# Altium PCB PCB4.PcbDoc (part 4 of 7)
Units mm, origin at the board's own origin, x right, y up, seen from the top; angles counter-clockwise.
Board outline 234.9 x 198.3 mm, 4 copper layers (Top Layer, Signal Layer 2, Mid, Bottom Layer), stack 3.052 mm thick; 410 components, 320 nets, 2032 pads, 297 vias.
Unrouted connection lines stored in the file: 1.
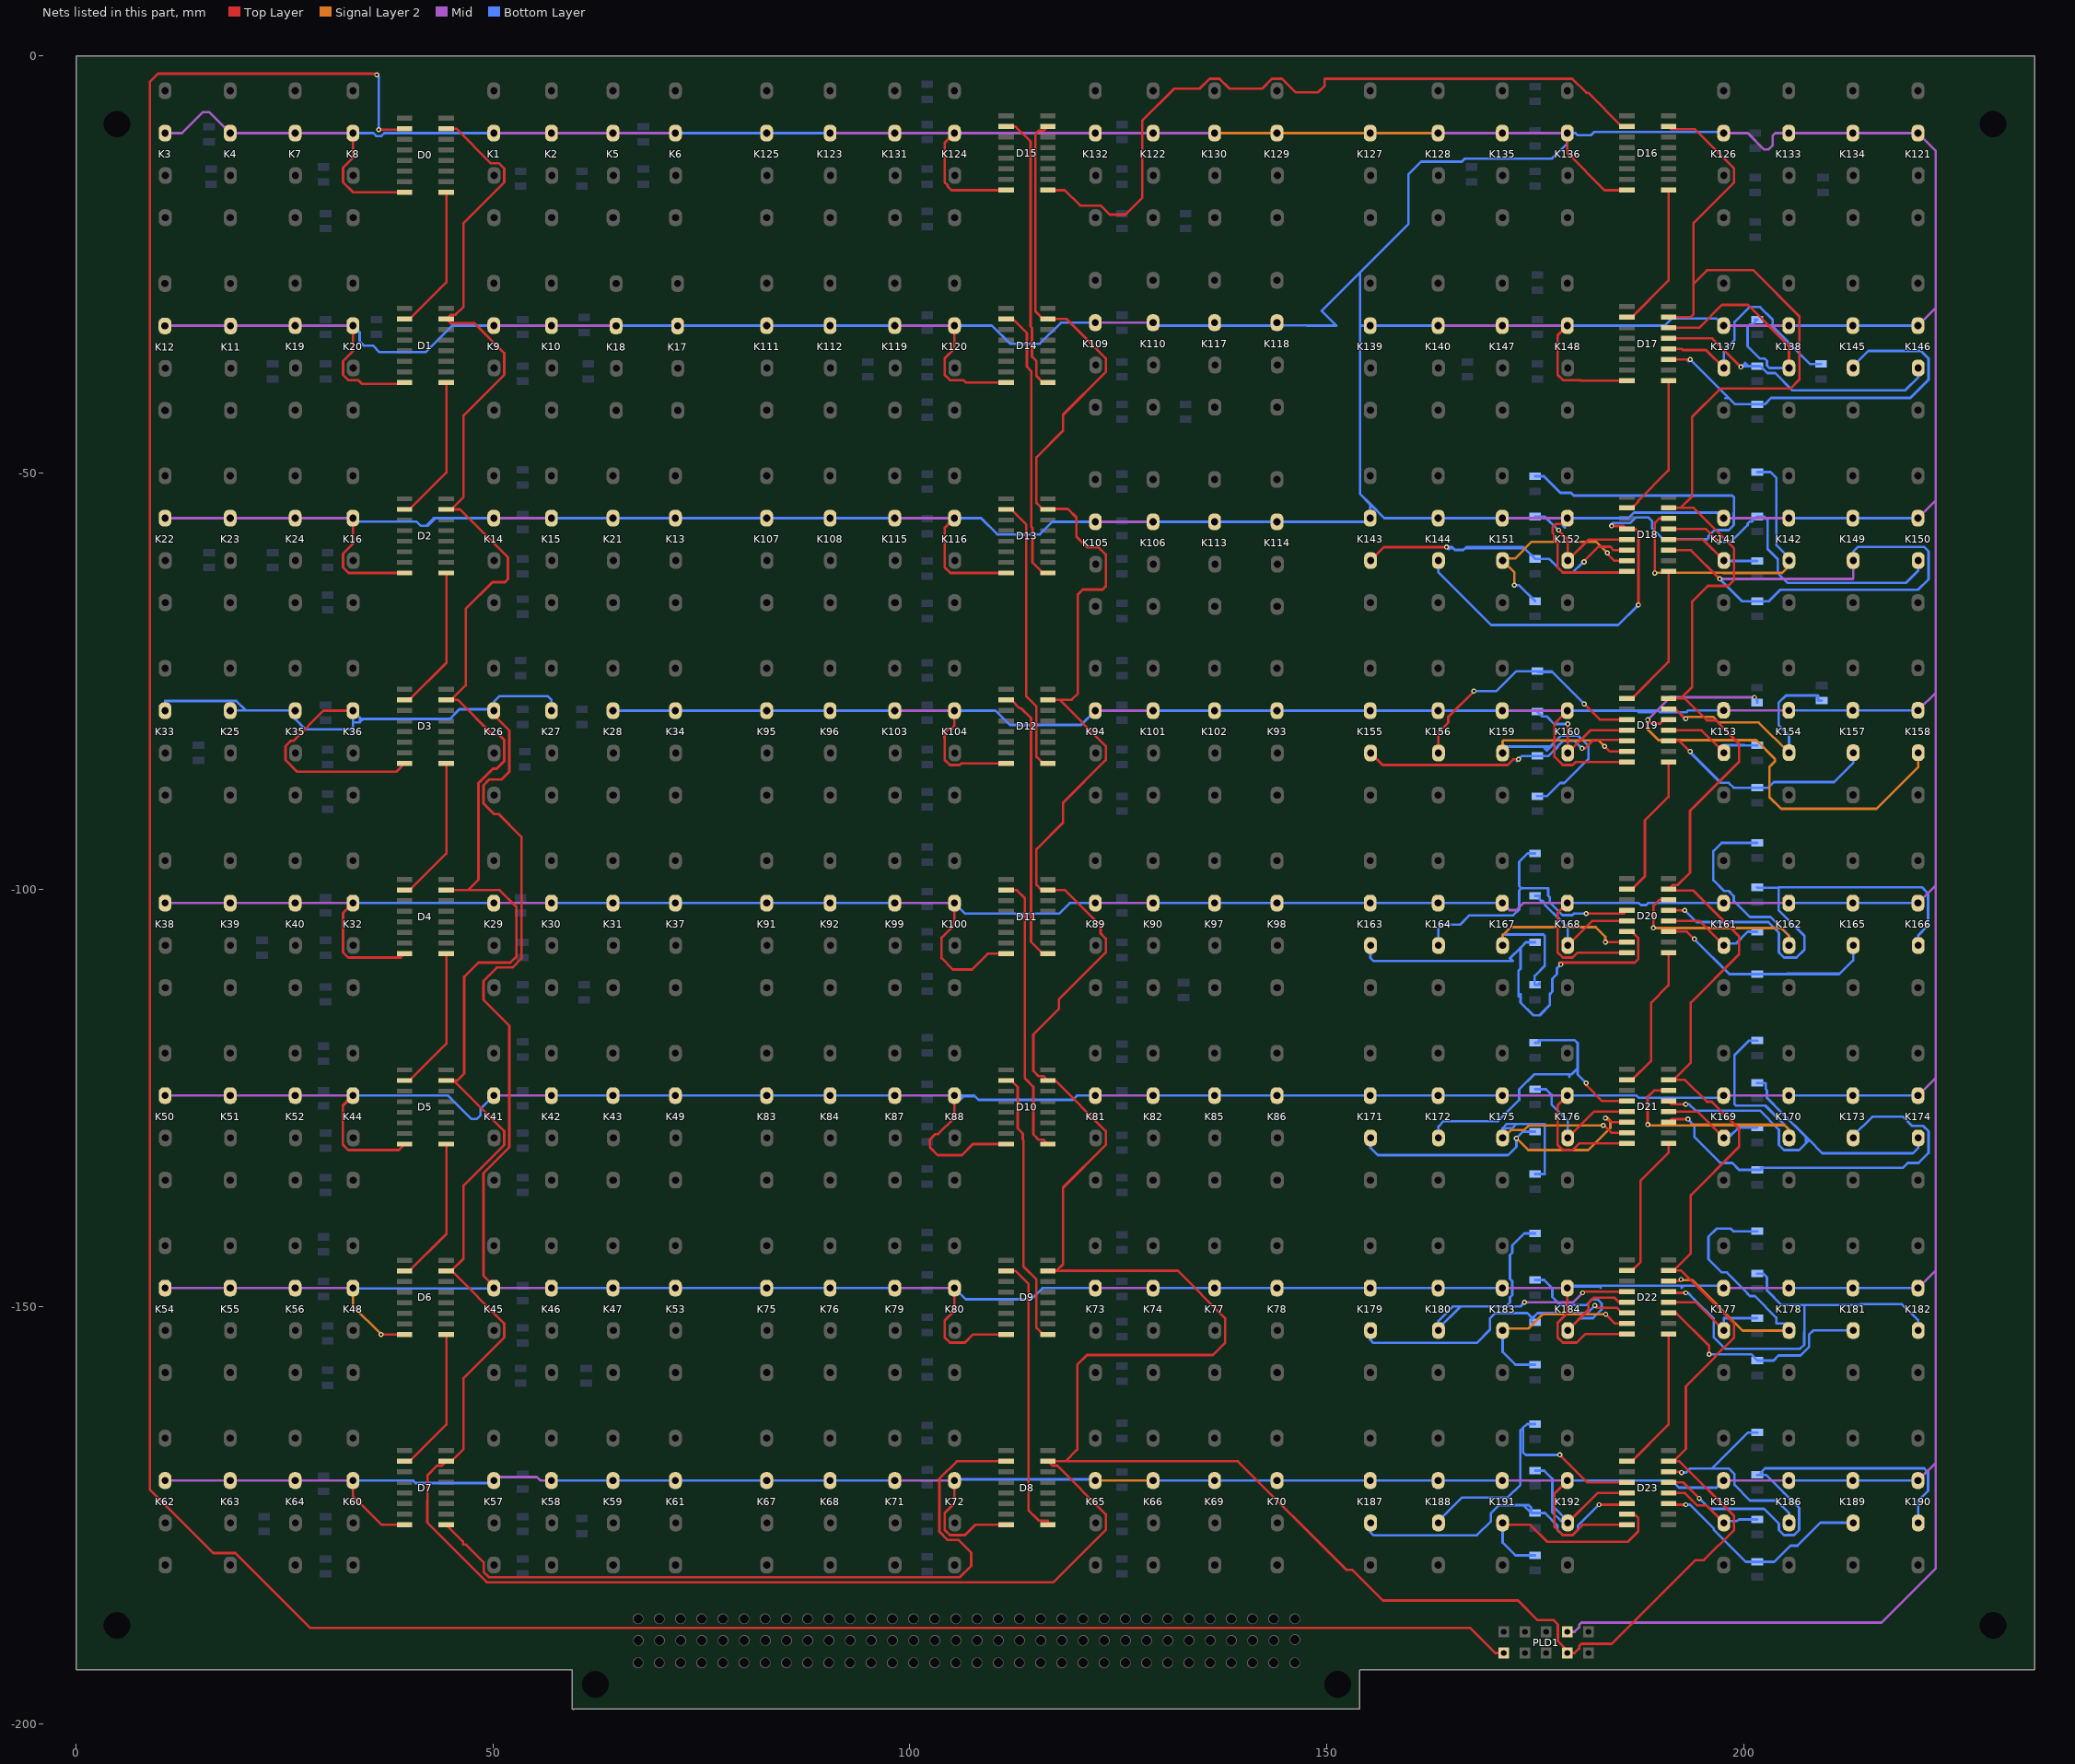
[diagram p6: the nets of this part, all layers, seen from the top]

## Via types
v1: diameter 0.6, hole 0.3, Top Layer to Bottom Layer, 292 vias
v2: diameter 0.7, hole 0.3, Top Layer to Bottom Layer, 5 vias

## Nets (pads, with @x,y where several pads share a name; then routed paths per layer and width w, separated by ;. In a path a pad name is that pad's centre, name@x,y a point inside that pad or via, vN(x,y) a via of type N, cw(c..) or ccw(c..) an arc to the next point about the centre after c; other vN are vias at no path point) (continued)
D17-4: D17.14 K138.3 VD141.A | length 31.6
  Top Layer w0.3: D17.14@190.966,-32.622 194.631,-32.622 197.375,-29.878 200.48,-29.878 205.417,-34.815 K138.3@205.417,-37.436
  Bottom Layer w0.3: VD141.A@201.319,-31.624 VD141.A@201.605,-31.625 201.005,-32.225 200.719,-32.225 200.455,-32.488 200.455,-34.832 201.936,-36.313 202.491,-36.313 202.755,-36.576 202.755,-37.132 203.059,-37.436 K138.3@205.417,-37.436 K138.3@205.417,-36.549
D17-5: D17.13 K146.3 VD142.A | length 35.5
  Top Layer w0.3: D17.13@190.966,-33.892 196.213,-33.892 v1(199.642,-37.32)
  Bottom Layer w0.3: v1(199.642,-37.32) v1@199.75,-37.212 ; K146.3@220.913,-37.436 220.913,-38.527 219.326,-40.115 205.814,-40.115 203.735,-38.036 202.811,-38.036 201.987,-37.212 200.55,-37.212 ; v1@199.75,-37.212 200.15,-36.812 200.55,-37.212 ; v1@199.75,-37.212 200.55,-37.212
D17-6: D17.12 K137.3 VD143.A | length 28.1
  Top Layer w0.3: D17.12@190.966,-35.162 192.542,-35.162 192.656,-35.277 195.447,-35.277 K137.3@197.607,-37.436
  Bottom Layer w0.3: K137.3@197.607,-37.436 197.607,-35.365 198.88,-34.092 198.88,-31.91 200.658,-30.132 201.928,-30.132 203.452,-31.656 203.452,-32.494 207.916,-36.958 VD143.A@209.256,-36.959
D17-7: D17.11 K145.3 VD144.A | length 48.1
  Top Layer w0.3: D17.11@190.966,-36.432 v1(193.584,-36.432)
  Bottom Layer w0.3: 193.292,-36.558 v1@193.374,-36.641 ; v1(193.584,-36.432) 198.193,-41.041 ; 197.774,-41.041 198.193,-41.041 ; K145.3@213.103,-37.436 213.103,-37.193 214.907,-35.39 221.232,-35.39 222.146,-36.304 222.146,-38.844 219.962,-41.029 203.274,-41.029 202.518,-41.784 VD144.A@201.605,-41.785 198.936,-41.784 198.193,-41.041
D18-0: D18.4 K144.3 VD145.A | length 87.9
  Top Layer w0.3: v1(184.148,-56.371) 185.585,-56.371 D18.4@185.966,-56.752 187.005,-56.752 187.348,-57.094 v1(187.348,-65.845)
  Bottom Layer w0.3: K144.3@163.379,-60.514 163.379,-61.704 163.379,-61.942 169.695,-68.258 184.935,-68.258 v1(187.348,-65.845) ; VD145.A@174.965,-50.421 176.012,-50.42 177.995,-52.404 179.267,-52.404 179.601,-52.738 ; 180.338,-52.738 179.601,-52.738 ; v1(184.148,-56.371) 184.148,-56.117 184.23,-56.034 186.38,-56.034 187.047,-55.366 188.593,-55.366 188.974,-55.747 188.974,-56.624 190.32,-57.971 195.582,-57.971 195.752,-57.801 195.752,-57.589 196.468,-56.873 196.965,-56.873 196.976,-56.884 198.158,-56.884 198.779,-56.263 198.779,-54.774 198.803,-54.75 198.803,-52.916 198.626,-52.738 179.601,-52.738
D18-1: D18.5 K152.3 VD146.A | length 15.7
  Top Layer w0.3: v1(177.798,-56.879) 177.798,-56.929 178.875,-58.007 K152.3@178.875,-60.514 181.367,-58.022 D18.5@185.966,-58.022
  Bottom Layer w0.3: VD146.A@174.966,-55.247 176.115,-55.246 177.747,-56.879 v1(177.798,-56.879)
D18-2: D18.6 K143.3 VD147.A | length 44.2
  Top Layer w0.3: K143.3@155.232,-60.514 156.835,-58.91 v1(164.336,-58.91) ; v2(180.846,-60.689) 180.742,-60.689 182.559,-58.872 183.97,-58.872 184.39,-59.292 D18.6@185.966,-59.292
  Bottom Layer w0.3: v2@180.592,-60.839 179.466,-61.964 178.284,-61.964 177.008,-60.688 176.646,-60.326 VD147.A@174.966,-60.327 173.703,-59.064 ; v2@180.592,-60.689 v2(180.846,-60.689) ; 165.357,-59.257 165.011,-58.91 v1(164.336,-58.91) 164.59,-59.164 164.69,-59.064 165.164,-59.064 165.357,-59.257 ; 165.357,-59.257 165.854,-59.257 ; 165.357,-59.257 165.854,-59.257 ; 165.854,-59.257 166.374,-59.257 ; 165.854,-59.257 166.374,-59.257 ; 166.374,-59.257 166.567,-59.064 173.703,-59.064 ; 166.374,-59.257 166.72,-58.91 173.55,-58.91 173.703,-59.064
D18-3: D18.7 K151.3 VD148.A | length 23.8
  Top Layer w0.3: v1(183.64,-59.622) 183.64,-59.723 184.478,-60.562 D18.7@185.966,-60.562
  Signal Layer 2 w0.3: v1(172.464,-63.482) 172.464,-61.912 K151.3@171.065,-60.514 171.065,-60.282 172.54,-60.282 174.546,-58.275 181.658,-58.275 182.293,-58.275 v1(183.64,-59.622)
  Bottom Layer w0.3: v1(172.464,-63.482) 173.042,-63.482 VD148.A@174.966,-65.407
D18-4: D18.14 K142.3 VD149.A | length 38.2
  Top Layer w0.3: v1(189.329,-62.022) 189.329,-55.989 189.837,-55.482 D18.14@190.966,-55.482
  Signal Layer 2 w0.3: v1(189.329,-62.022) 189.381,-61.97 197.412,-61.97 197.464,-62.022 204.572,-62.022 205.23,-61.364 205.417,-61.364 K142.3@205.417,-60.514
  Bottom Layer w0.3: VD149.A@201.605,-49.913 203.198,-49.912 203.909,-50.624 203.909,-58.68 205.417,-60.189 205.417,-60.282 K142.3@205.417,-60.514
D18-5: D18.13 K150.3 VD150.A | length 40
  Top Layer w0.3: D18.13@190.966,-56.752 195.451,-56.752 v1(196.975,-58.275)
  Bottom Layer w0.3: v1(196.975,-58.275) 198.464,-58.275 200.455,-56.284 200.455,-56.11 200.719,-55.847 201.005,-55.847 VD150.A@201.605,-55.247 202.416,-55.246 202.842,-55.672 202.842,-59.114 204.052,-60.324 204.052,-62 205.255,-63.203 219.414,-63.203 220.913,-61.704 K150.3@220.913,-60.514
D18-6: D18.12 K141.3 VD151.A | length 11.7
  Top Layer w0.3: D18.12@190.966,-58.022 195.114,-58.022 K141.3@197.607,-60.514
  Bottom Layer w0.3: K141.3@197.607,-60.514 197.673,-60.58 VD151.A@201.605,-60.581
D18-7: D18.11 K149.3 VD152.A | length 66.9
  Top Layer w0.3: D18.11@190.966,-59.292 193.673,-59.292 v1(197.102,-62.72)
  Mid w0.3: v1(197.102,-62.72) 213.078,-62.72 213.103,-62.695 K149.3@213.103,-60.514
  Bottom Layer w0.3: v1(197.102,-62.72) 199.788,-65.406 VD152.A@201.605,-65.407 203.001,-65.406 204.391,-64.016 220.901,-64.016 222.146,-62.771 222.146,-59.418 221.613,-58.885 213.675,-58.885 213.103,-59.457 K149.3@213.103,-60.514
D19-0: D19.4 K156.3 VD153.A | length 32.8
  Top Layer w0.3: K156.3@163.379,-83.592 163.379,-81.134 164.551,-79.962 164.551,-79.269 v1(167.638,-76.182) ; v1(180.846,-77.706) 182.751,-79.611 D19.4@185.966,-79.611
  Bottom Layer w0.3: v1(167.638,-76.182) 170.315,-76.182 171.616,-74.882 172.709,-73.788 VD153.A@175.22,-73.789 ; v1(180.846,-77.706) 177.036,-73.896 ; VD153.A@175.22,-73.789 175.328,-73.896 177.036,-73.896 ; VD153.A@175.22,-73.789 176.928,-73.788 177.036,-73.896
D19-1: D19.5 K160.3 VD154.A | length 17.4
  Top Layer w0.3: v1(178.875,-80.115) K160.3@178.875,-83.592 181.585,-80.881 D19.5@185.966,-80.881
  Bottom Layer w0.3: VD154.A@175.22,-78.615 175.82,-79.214 176.369,-79.214 ; v1@179.068,-80.115 v1(178.875,-80.115) 177.27,-80.115 ; 176.37,-79.214 177.27,-80.115 ; 176.369,-79.214 177.27,-80.115
D19-2: D19.6 K155.3 VD155.A | length 33.7
  Top Layer w0.3: K155.3@155.232,-83.592 156.682,-85.042 171.656,-85.042 172.343,-84.355 v1(172.972,-84.355) ; v1(180.592,-83.04) 180.947,-83.04 181.963,-82.024 185.722,-82.024 185.734,-82.036 185.851,-82.036 D19.6@185.966,-82.151
  Bottom Layer w0.3: v1@172.762,-84.565 v1(172.972,-84.355) 173.378,-83.948 VD155.A@175.219,-83.949 176.57,-83.948 177.663,-82.855 177.663,-82.762 178.284,-82.142 179.693,-82.142 v1(180.592,-83.04)
D19-3: D19.7 K159.3 VD156.A | length 40.2
  Top Layer w0.3: v1(183.284,-82.786) 183.919,-83.421 D19.7@185.966,-83.421
  Signal Layer 2 w0.3: K159.3@171.065,-83.592 171.065,-82.202 171.192,-82.075 182.573,-82.075 v1(183.284,-82.786)
  Bottom Layer w0.3: K159.3@171.065,-83.592 171.065,-82.837 175.918,-82.837 ; VD156.A@175.22,-88.775 176.382,-88.774 177.96,-87.197 178.467,-87.197 181.354,-84.311 181.354,-82.742 181.342,-82.73 180.153,-81.542 178.035,-81.542 177.063,-82.514 ; 175.918,-82.837 176.375,-83.294 177.063,-82.607 177.063,-82.514 ; 175.918,-82.837 176.74,-82.837 177.063,-82.514
D19-4: D19.14 K154.3 VD157.A | length 29.5
  Top Layer w0.3: D19.14@190.966,-78.341 191.821,-78.341 192.964,-79.485 v1(193.038,-79.485)
  Signal Layer 2 w0.3: v1(193.038,-79.485) 193.067,-79.485 193.292,-79.26 196.299,-79.26 196.976,-79.936 201.787,-79.936 K154.3@205.417,-83.566
  Bottom Layer w0.3: K154.3@205.417,-83.566 205.417,-81.491 204.163,-80.237 204.163,-77.579 205.052,-76.69 208.887,-76.69 208.887,-77.306 VD157.A@209.332,-77.307
D19-5: D19.13 K158.3 VD158.A | length 71.5
  Top Layer w0.3: v1(188.466,-79.611) 188.916,-80.061 189.965,-80.061 190.415,-79.611 D19.13@190.966,-79.611
  Mid w0.3: v1(188.466,-79.611) 191.158,-76.919 v1(201.267,-76.919)
  Signal Layer 2 w0.3: v1(188.466,-79.611) 188.466,-80.754 189.761,-82.05 190.904,-82.05 ; K158.3@220.913,-83.566 220.913,-85.264 215.898,-90.279 204.468,-90.279 203.071,-88.882 203.071,-85.25 203.731,-84.59 203.731,-84.311 201.47,-82.05 199.87,-82.05 ; 190.904,-82.05 190.929,-82.075 193.196,-82.075 193.221,-82.05 ; 190.904,-82.05 193.221,-82.05 ; 193.221,-82.05 199.87,-82.05 ; 193.221,-82.05 193.235,-82.036 199.857,-82.036 199.87,-82.05
  Bottom Layer w0.3: v1(201.267,-76.919) 201.597,-77.249 201.597,-77.56 VD158.A@201.586,-77.561
D19-6: D19.12 K153.3 VD159.A | length 13.9
  Top Layer w0.3: D19.12@190.966,-80.881 194.922,-80.881 K153.3@197.607,-83.566
  Bottom Layer w0.3: K153.3@197.607,-83.566 197.607,-82.659 198.811,-82.659 ; VD159.A@201.605,-82.679 200.073,-82.678 ; 198.811,-82.659 198.83,-82.678 200.073,-82.678 ; 198.811,-82.659 200.054,-82.659 200.073,-82.678
D19-7: D19.11 K157.3 VD160.A | length 32.3
  Top Layer w0.3: D19.11@190.966,-82.151 192.276,-82.151 v1(193.546,-83.421)
  Bottom Layer w0.3: K157.3@213.103,-83.566 213.103,-84.794 210.818,-87.079 203.604,-87.079 202.925,-87.758 VD160.A@201.605,-87.759 198.78,-87.758 198.193,-87.172 197.296,-87.172 ; 197.296,-87.172 v1(193.546,-83.421) 193.546,-83.548 197.168,-87.172 197.296,-87.172
D20-0: D20.4 K164.3 VD161.A | length 36
  Top Layer w0.3: v1(181.1,-102.852) 185.585,-102.852 D20.4@185.966,-102.472
  Bottom Layer w0.3: K164.3@163.379,-106.669 163.379,-104.619 163.825,-104.173 165.987,-104.173 167.104,-103.056 172.337,-103.056 173.048,-102.344 173.048,-100.058 173.302,-99.804 ; VD161.A@174.966,-95.633 174.07,-95.632 173.048,-96.655 173.048,-99.551 173.302,-99.804 ; v1(181.1,-102.852) 179.613,-102.852 179.426,-103.039 178.244,-103.039 176.716,-101.511 176.716,-100.876 176.528,-100.688 176.528,-99.804 173.302,-99.804
D20-1: D20.5 K168.3 VD162.A | length 16.3
  Top Layer w0.3: K168.3@178.875,-106.669 181.803,-103.742 D20.5@185.966,-103.742
  Bottom Layer w0.3: VD162.A@174.966,-100.713 175.516,-100.712 175.516,-101.16 175.668,-101.312 175.852,-101.312 176.116,-101.576 176.116,-101.76 177.995,-103.639 178.036,-103.639 178.875,-104.478 K168.3@178.875,-106.669
D20-2: D20.6 K163.3 VD163.A | length 54.2
  Top Layer w0.3: v1(178.052,-108.948) 177.822,-108.719 186.923,-108.719 187.341,-108.302 187.341,-105.795 186.557,-105.012 D20.6@185.966,-105.012
  Bottom Layer w0.3: K163.3@155.232,-106.669 155.232,-108.176 155.573,-108.517 172.273,-108.517 171.956,-108.199 173.216,-106.939 ; 172.972,-112.781 172.972,-109.703 173.216,-109.459 173.216,-106.939 ; 173.216,-112.517 173.216,-113.511 174.75,-115.045 175.512,-115.045 176.728,-113.828 176.728,-112.505 177.023,-112.209 177.023,-110.647 177.585,-110.085 177.585,-109.415 v1(178.052,-108.948) ; VD163.A@174.966,-106.301 173.854,-106.3 173.216,-106.939
D20-3: D20.7 K167.3 VD164.A | length 31.4
  Top Layer w0.3: v1(183.386,-106.282) D20.7@185.966,-106.282
  Signal Layer 2 w0.3: K167.3@171.065,-106.669 171.065,-105.496 172.083,-104.478 182.242,-104.478 183.386,-105.621 v1(183.386,-106.282) v1@183.386,-106.408
  Bottom Layer w0.3: K167.3@171.065,-106.669 171.065,-105.367 175.943,-105.367 176.121,-105.545 176.121,-109.101 174.916,-110.306 174.916,-111.38 175.516,-111.38 175.516,-111.193 VD164.A@175.486,-111.163
D20-4: D20.14 K162.3 VD165.A | length 45.1
  Top Layer w0.3: v1(189.151,-104.58) 189.151,-101.913 189.863,-101.202 D20.14@190.966,-101.202
  Signal Layer 2 w0.3: v1(189.151,-104.58) 204.477,-104.58 205.417,-105.519 K162.3@205.417,-106.669
  Bottom Layer w0.3: VD165.A@201.605,-94.363 197.337,-94.362 196.34,-95.359 196.34,-98.865 197.614,-100.139 198.158,-100.139 198.779,-100.76 198.779,-101.304 200.743,-103.268 203.192,-103.268 205.417,-105.493 K162.3@205.417,-106.669
D20-5: D20.13 K166.3 VD166.A | length 56.7
  Top Layer w0.3: D20.13@190.966,-102.472 v1(192.911,-102.472)
  Bottom Layer w0.3: v1(192.911,-102.472) 194.308,-103.868 202.944,-103.868 204.205,-105.13 204.205,-107.499 204.826,-108.119 206.313,-108.119 207.262,-107.17 207.262,-105.515 204.165,-102.419 204.165,-99.756 ; VD166.A@201.605,-99.697 201.654,-99.745 204.154,-99.745 204.165,-99.756 ; K166.3@220.913,-106.669 220.913,-105.443 222.095,-104.261 222.095,-100.439 221.352,-99.696 204.214,-99.696 204.165,-99.745 204.165,-99.756
D20-6: D20.12 K161.3 VD167.A | length 12.7
  Top Layer w0.3: D20.12@190.966,-103.742 194.679,-103.742 K161.3@197.607,-106.669
  Bottom Layer w0.3: K161.3@197.607,-106.669 197.607,-106.434 199.051,-106.434 200.454,-105.03 VD167.A@201.605,-105.031
D20-7: D20.11 K165.3 VD168.A | length 33.1
  Top Layer w0.3: D20.11@190.966,-105.012 193.165,-105.012 v1(194.054,-105.9)
  Bottom Layer w0.3: v1(194.054,-105.9) 198.264,-110.11 VD168.A@201.605,-110.111 205.134,-110.11 ; K165.3@213.103,-106.669 213.103,-108.44 211.528,-110.015 ; 205.134,-110.11 211.433,-110.11 211.528,-110.015 ; 205.134,-110.11 205.23,-110.015 211.528,-110.015
D21-0: D21.4 K172.3 VD169.A | length 38.7
  Top Layer w0.3: v1(181.1,-123.172) 181.1,-123.426 183.005,-125.331 D21.4@185.966,-125.331
  Bottom Layer w0.3: K172.3@163.379,-129.747 163.379,-128.379 164.014,-127.744 170.508,-127.744 173.048,-125.204 173.048,-123.934 174.851,-122.131 179.068,-122.131 ; VD169.A@174.965,-118.326 175.41,-118.326 175.41,-118.016 179.703,-118.016 180.058,-118.372 180.058,-121.394 ; 179.068,-122.41 179.068,-122.131 ; v1(181.1,-123.172) 180.058,-122.131 180.058,-121.394 ; 179.068,-122.131 179.322,-122.131 180.058,-121.394
D21-1: D21.5 K176.3 VD170.A | length 16.6
  Top Layer w0.3: K176.3@178.875,-129.747 182.021,-126.601 D21.5@185.966,-126.601
  Bottom Layer w0.3: VD170.A@174.966,-123.914 176.279,-123.914 176.934,-124.569 176.934,-125.727 178.875,-127.668 K176.3@178.875,-129.747
D21-2: D21.6 K171.3 VD171.A | length 40.4
  Top Layer w0.3: v1(183.386,-127.351) 183.5,-127.351 183.853,-127.704 183.983,-127.704 184.15,-127.871 D21.6@185.966,-127.871
  Signal Layer 2 w0.3: v1(172.718,-129.776) 174.138,-131.197 178.284,-131.197 181.324,-131.197 183.983,-128.538 183.983,-127.704 183.63,-127.351 v1(183.386,-127.351)
  Bottom Layer w0.3: K171.3@155.232,-129.747 155.232,-130.919 156.121,-131.808 171.707,-131.808 172.718,-130.798 v1(172.718,-129.776) 173.5,-128.994 174.521,-128.994 VD171.A@174.966,-128.994
D21-3: D21.7 K175.3 VD172.A | length 31.5
  Top Layer w0.3: v1(183.132,-128.252) 183.259,-128.252 184.148,-129.141 D21.7@185.966,-129.141
  Signal Layer 2 w0.3: K175.3@171.065,-129.747 171.065,-129.497 171.392,-129.497 172.107,-128.782 173.681,-128.782 174.211,-128.252 v1(183.132,-128.252)
  Bottom Layer w0.3: K175.3@171.065,-129.747 171.065,-128.583 ; VD172.A@174.966,-134.074 176.121,-134.074 176.121,-128.075 172.743,-128.075 ; 171.065,-128.583 172.235,-128.583 172.743,-128.075 ; 171.065,-128.583 171.573,-128.075 172.743,-128.075
D21-4: D21.14 K170.3 VD173.A | length 53.8
  Top Layer w0.3: v1(188.466,-128.151) 188.466,-124.823 189.228,-124.061 D21.14@190.966,-124.061
  Signal Layer 2 w0.3: v1(188.466,-128.151) 188.555,-128.241 193.602,-128.241 ; K170.3@205.417,-129.747 205.417,-128.78 204.877,-128.241 ; 193.602,-128.241 193.692,-128.151 204.787,-128.151 204.877,-128.241 ; 193.602,-128.241 204.877,-128.241
  Bottom Layer w0.3: VD173.A@201.605,-118.072 200.639,-118.072 198.858,-119.854 198.858,-125.691 199.042,-125.874 202.572,-125.874 205.417,-128.719 K170.3@205.417,-129.747
D21-5: D21.13 K174.3 VD174.A | length 47.9
  Top Layer w0.3: D21.13@190.966,-125.331 191.347,-125.712 v1(193.038,-125.712)
  Bottom Layer w0.3: v1(193.038,-125.712) 193.423,-125.712 194.185,-126.474 201.928,-126.474 204.205,-128.752 204.205,-130.576 204.826,-131.197 206.629,-131.197 ; VD174.A@201.605,-123.152 202.563,-123.152 202.633,-123.223 202.633,-123.894 202.755,-124.016 202.755,-124.935 204.537,-126.717 207.444,-129.624 ; K174.3@220.913,-129.747 220.913,-130.919 220.253,-131.58 210.233,-131.58 209.4,-131.58 207.823,-130.003 ; 206.629,-131.197 207.444,-130.382 207.444,-129.624 ; 206.629,-131.197 207.823,-130.003 ; 207.444,-129.624 207.823,-130.003
D21-6: D21.12 K169.3 VD175.A | length 12.6
  Top Layer w0.3: D21.12@190.966,-126.601 194.461,-126.601 K169.3@197.607,-129.747
  Bottom Layer w0.3: K169.3@197.607,-129.747 197.607,-129.497 198.377,-129.497 199.388,-128.486 VD175.A@201.605,-128.486
D21-7: D21.11 K173.3 VD176.A | length 49.2
  Top Layer w0.3: D21.11@190.966,-127.871 191.347,-127.49 v1(193.292,-127.49)
  Bottom Layer w0.3: v1(193.292,-127.49) 194.054,-128.252 194.054,-129.609 197.197,-132.752 198.605,-132.752 199.419,-133.566 VD176.A@201.605,-133.566 202.055,-133.566 202.055,-133.332 219.061,-133.332 219.641,-132.752 220.948,-132.752 222.146,-131.554 222.146,-128.939 221.504,-128.297 220.174,-128.297 219.088,-127.211 215.389,-127.211 213.103,-129.497 K173.3@213.103,-129.747
D22-0: D22.4 K180.3 VD177.A | length 45.6
  Top Layer w0.3: v1(180.668,-148.318) 180.795,-148.192 D22.4@185.966,-148.192
  Mid w0.3: v1(173.683,-149.461) 179.525,-149.461 v1(180.668,-148.318)
  Bottom Layer w0.3: K180.3@163.379,-152.825 K180.3@163.379,-152.586 ; v1(173.683,-149.461) 173.2,-149.944 171.498,-149.944 ; VD177.A@174.966,-141.186 173.67,-141.186 172.237,-142.62 172.237,-143.494 171.956,-143.776 171.956,-146.634 172.237,-146.915 172.237,-148.574 171.956,-148.856 171.956,-149.487 171.498,-149.944 ; K180.3@163.379,-152.586 166.013,-149.951 171.491,-149.951 171.498,-149.944 ; K180.3@163.379,-152.586 163.379,-151.663 165.098,-149.944 171.498,-149.944
D22-1: D22.5 K184.3 VD178.A | length 25.6
  Top Layer w0.3: K184.3@178.875,-152.825 181.366,-150.334 181.366,-149.532 181.998,-148.899 184.465,-148.899 185.028,-149.462 D22.5@185.966,-149.462
  Bottom Layer w0.3: VD178.A@174.966,-146.774 176.05,-146.774 177.023,-147.747 177.023,-148.823 177.995,-149.795 181.103,-149.795 181.805,-149.092 182.426,-149.092 182.942,-149.608 182.942,-150.318 181.903,-151.357 180.343,-151.357 K184.3@178.875,-152.825
D22-2: D22.6 K179.3 VD179.A | length 36.9
  Top Layer w0.3: v1(182.116,-149.842) 182.37,-150.096 184.739,-150.096 185.374,-150.732 D22.6@185.966,-150.732
  Bottom Layer w0.3: K179.3@155.232,-152.825 155.232,-153.972 155.573,-154.313 166.622,-154.313 167.993,-154.313 169.543,-152.763 169.543,-151.392 170.178,-150.757 174.038,-150.757 174.521,-151.239 VD179.A@174.521,-151.493 ; VD179.A@174.965,-151.854 174.521,-151.854 VD179.A@174.521,-151.493 ; 182.342,-150.069 v1(182.116,-149.842) 181.201,-150.757 175.258,-150.757 VD179.A@174.521,-151.493
D22-3: D22.7 K183.3 VD180.A | length 23.4
  Top Layer w0.3: v1(183.436,-150.884) 184.554,-152.002 D22.7@185.966,-152.002
  Signal Layer 2 w0.3: K183.3@171.065,-152.825 171.065,-152.586 174.191,-152.586 175.893,-150.884 v1(183.436,-150.884)
  Bottom Layer w0.3: K183.3@171.065,-152.825 171.065,-155.409 172.591,-156.934 VD180.A@174.966,-156.934
D22-4: D22.14 K178.3 VD181.A | length 40.4
  Top Layer w0.3: D22.14@190.966,-146.922 192.402,-146.922 192.477,-146.847 v1(192.477,-146.715)
  Signal Layer 2 w0.3: v1(192.477,-146.715) 192.557,-146.794 193.8,-146.794 199.845,-152.84 205.417,-152.84 K178.3@205.417,-152.825
  Bottom Layer w0.3: VD181.A@201.605,-140.932 198.724,-140.932 198.407,-140.615 196.727,-140.615 195.755,-141.587 195.755,-144.264 197.361,-145.87 197.956,-145.87 200.455,-148.37 200.455,-148.449 200.719,-148.712 201.305,-148.712 203.882,-151.289 203.882,-151.975 205.417,-151.975 K178.3@205.417,-152.825
D22-5: D22.13 K182.3 VD182.A | length 49.2
  Top Layer w0.3: D22.13@190.966,-148.192 191.092,-148.318 v1(193.038,-148.318)
  Bottom Layer w0.3: v1(193.038,-148.318) 193.292,-148.318 194.054,-149.08 196.395,-151.422 196.395,-153.454 196.395,-153.654 197.755,-155.014 206.748,-155.014 207.229,-154.534 207.229,-153.054 207.262,-153.021 207.262,-151.319 207.262,-149.795 ; VD182.A@201.605,-146.012 202.329,-146.012 202.755,-146.438 202.755,-148.013 204.537,-149.795 205.738,-149.795 206.474,-149.795 207.262,-149.795 ; K182.3@220.913,-152.825 220.913,-151.632 218.962,-149.68 214.017,-149.68 213.903,-149.795 207.519,-149.795 207.262,-149.795
D22-6: D22.12 K177.3 VD183.A | length 13.5
  Top Layer w0.3: D22.12@190.966,-149.462 194.244,-149.462 K177.3@197.607,-152.825
  Bottom Layer w0.3: K177.3@197.607,-152.825 197.607,-151.346 VD183.A@201.605,-151.346
D22-7: D22.11 K181.3 VD184.A | length 27.5
  Top Layer w0.3: D22.11@190.966,-150.732 191.895,-150.732 195.832,-154.668 v1(195.832,-155.684)
  Bottom Layer w0.3: v1(195.832,-155.684) 200.863,-155.684 VD184.A@201.605,-156.426 203.565,-156.426 204.162,-155.83 206.781,-155.83 207.829,-154.782 207.829,-153.303 208.317,-152.814 213.103,-152.814 K181.3@213.103,-152.825
D23-0: D23.4 K188.3 VD185.A | length 37.3
  Top Layer w0.3: v1(177.925,-167.749) 179.068,-168.892 181.227,-171.051 D23.4@185.966,-171.051
  Bottom Layer w0.3: K188.3@163.379,-175.902 163.379,-175.674 166.198,-172.855 171.676,-172.855 173.2,-171.331 173.2,-168.892 173.2,-168.334 173.2,-164.834 173.518,-164.516 ; VD185.A@174.966,-164.046 173.988,-164.046 173.518,-164.516 ; v1(177.925,-167.749) 173.835,-167.749 173.518,-167.432 173.518,-164.516
D23-1: D23.5 K192.3 VD186.A | length 20.2
  Top Layer w0.3: K192.3@178.875,-175.902 182.456,-172.321 D23.5@185.966,-172.321
  Bottom Layer w0.3: VD186.A@174.966,-169.634 176.05,-169.634 177.023,-170.607 177.023,-173.822 ; K192.3@178.875,-175.902 K192.3@178.875,-175.674 ; 177.023,-173.822 K192.3@178.875,-175.674 ; 177.023,-173.822 177.023,-174.635 178.062,-175.674 K192.3@178.875,-175.674
D23-2: D23.6 K187.3 VD187.A | length 39.4
  Top Layer w0.3: v1(182.624,-173.718) 185.839,-173.718 D23.6@185.966,-173.591
  Bottom Layer w0.3: K187.3@155.232,-175.902 155.232,-177.035 155.573,-177.376 167.993,-177.376 169.67,-175.7 169.67,-174.734 170.635,-173.769 173.576,-173.769 ; v1(182.624,-173.718) 180.087,-176.255 180.087,-176.732 179.466,-177.352 178.284,-177.352 177.663,-176.732 177.663,-176.25 176.128,-174.714 VD187.A@174.966,-174.714 VD187.A@174.521,-174.714 ; 173.576,-173.769 VD187.A@174.521,-174.714 ; 173.576,-173.769 174.191,-173.769 174.521,-174.099 VD187.A@174.521,-174.714
D23-3: D23.7 K191.3 VD188.A | length 27.9
  Top Layer w0.3: K191.3@171.065,-175.902 171.065,-176.131 174.369,-176.131 176.401,-178.163 186.071,-178.163 187.341,-176.893 187.341,-175.311 186.891,-174.861 D23.7@185.966,-174.861
  Bottom Layer w0.3: K191.3@171.065,-175.902 171.065,-178.269 172.591,-179.794 VD188.A@174.965,-179.794
D23-4: D23.14 K186.3 VD189.A | length 28.6
  Top Layer w0.3: D23.14@190.966,-169.781 192.453,-169.781 v1(192.53,-169.858)
  Bottom Layer w0.3: v1(192.53,-169.858) 193.088,-169.858 193.571,-169.375 ; VD189.A@201.605,-165.062 200.5,-165.062 196.19,-169.373 ; K186.3@205.417,-175.902 205.417,-174.734 203.893,-173.211 200.734,-173.211 198.88,-171.356 198.88,-170.094 198.158,-169.372 196.976,-169.372 196.19,-169.373 ; 193.571,-169.375 196.187,-169.375 196.19,-169.373 ; 193.571,-169.375 193.574,-169.373 196.19,-169.373
D23-5: D23.13 K190.3 VD190.A | length 55.6
  Top Layer w0.3: D23.13@190.966,-171.051 192.743,-171.051 v1(194.648,-172.956)
  Bottom Layer w0.3: v1(194.648,-172.956) 195.918,-174.227 202.436,-174.227 204.205,-175.996 204.205,-176.732 204.826,-177.352 206.008,-177.352 206.629,-176.732 206.629,-174.734 206.629,-174.102 204.8,-172.272 204.786,-172.272 202.656,-170.142 VD190.A@202.055,-170.142 ; VD190.A@201.605,-170.142 VD190.A@202.055,-170.142 ; K190.3@220.913,-175.902 220.913,-174.734 220.913,-173.224 222.095,-172.042 222.095,-169.832 221.613,-169.35 202.563,-169.35 202.055,-169.858 VD190.A@202.055,-170.142
D23-6: D23.12 K185.3 VD191.A | length 12.4
  Top Layer w0.3: D23.12@190.966,-172.321 192.952,-172.321 194.441,-173.81 195.515,-173.81 K185.3@197.607,-175.902
  Bottom Layer w0.3: K185.3@197.607,-175.902 197.607,-175.674 199.19,-175.674 199.388,-175.476 VD191.A@201.605,-175.476
D23-7: D23.11 K189.3 VD192.A | length 27.1
  Top Layer w0.3: D23.11@190.966,-173.591 191.093,-173.718 v1(193.038,-173.718)
  Bottom Layer w0.3: v1(193.038,-173.718) 193.546,-173.718 196.395,-176.568 196.395,-176.732 200.22,-180.556 VD192.A@201.605,-180.556 203.653,-180.556 205.573,-178.636 206.421,-178.636 209.18,-175.877 213.103,-175.877 K189.3@213.103,-175.902
DATA: D0.2 PLD1.1 | length 376.5
  Top Layer w0.3: v1(36.066,-2.282) 35.932,-2.149 9.841,-2.149 8.854,-3.136 8.854,-171.885 16.476,-179.508 19.117,-179.508 28.11,-188.501 167.18,-188.501 170.178,-191.498 PLD1.1@171.194,-191.498 ; v1(36.32,-8.872) D0.2@39.281,-8.872
  Bottom Layer w0.3: v1(36.066,-2.282) 36.32,-2.536 v1(36.32,-8.872)
EO: D0.15 D1.15 D2.15 D3.15 D4.15 D5.15 D6.15 D7.15 D8.15 D9.15 D10.15 D11.15 D12.15 D13.15 D14.15 D15.15 D16.15 D17.15 D18.15 D19.15 D20.15 D21.15 D22.15 D23.15 PLD1.4 | length 907.4
  Top Layer w0.3: D6.15@44.407,-145.688 D6.15@44.999,-145.688 ; D5.15@44.407,-122.864 D5.15@45.297,-122.864 ; D4.15@44.407,-100.04 46.988,-100.04 ; D3.15@44.407,-77.217 D3.15@44.999,-77.217 ; D2.15@44.407,-54.393 D2.15@44.999,-54.393 ; D0.15@44.407,-8.745 45.591,-8.745 49.754,-12.909 50.73,-12.909 51.351,-13.529 51.351,-15.188 46.48,-20.059 46.48,-30.089 45.519,-31.049 44.927,-31.049 D1.15@44.407,-31.569 44.927,-32.089 47.791,-32.089 51.351,-35.65 51.351,-38.266 46.48,-43.137 46.48,-52.912 D2.15@44.999,-54.393 ; D9.15@116.543,-145.688 117.563,-145.688 ; D12.15@116.543,-77.217 117.941,-77.217 ; D15.15@116.543,-8.491 116.024,-9.011 115.432,-9.011 115.06,-9.384 115.06,-30.677 115.952,-31.569 D14.15@116.543,-31.569 118.801,-31.569 123.487,-36.255 123.487,-37.914 118.362,-43.039 118.362,-44.94 115.168,-48.134 115.168,-53.609 115.952,-54.393 D13.15@116.543,-54.393 116.584,-54.393 116.638,-54.338 118.946,-54.338 119.962,-55.354 119.962,-57.666 121.206,-58.91 122.603,-58.91 123.492,-59.799 123.492,-63.609 123.111,-63.99 120.724,-63.99 120.14,-64.575 120.14,-76.455 119.378,-77.217 117.941,-77.217 ; D23.15@190.966,-168.511 D23.15@191.557,-168.511 ; D22.15@190.966,-145.652 D22.15@191.557,-145.652 ; D21.15@190.966,-122.791 D21.15@191.557,-122.791 ; D20.15@190.966,-99.932 191.486,-99.412 192.077,-99.412 193.534,-97.955 193.534,-90.53 199.419,-84.644 199.419,-82.489 196.612,-79.681 195.565,-79.681 192.955,-77.071 192.403,-77.071 ; D19.15@190.966,-77.071 192.403,-77.071 ; D18.15@190.966,-54.212 192.402,-54.212 ; D17.15@190.966,-31.352 193.614,-31.352 193.965,-31 193.965,-27.325 ; D16.15@190.966,-8.491 191.267,-8.792 194.082,-8.792 198.819,-13.529 198.819,-15.188 193.965,-20.041 193.965,-27.325 ; D20.15@191.867,-100.07 193.898,-100.07 199.419,-105.592 199.419,-107.747 193.638,-113.529 193.638,-120.711 D21.15@191.557,-122.791 ; D6.15@44.999,-145.688 46.48,-144.207 46.48,-135.448 51.351,-130.576 51.351,-128.918 D5.15@45.297,-122.864 ; D6.15@44.999,-145.688 45.043,-145.688 51.351,-151.995 51.351,-153.654 46.48,-158.526 46.48,-167.031 44.999,-168.511 D7.15@44.407,-168.511 43.888,-169.031 43.296,-169.031 42.162,-170.166 42.162,-173.173 42.123,-173.211 42.123,-175.871 49.264,-183.013 117.206,-183.013 123.487,-176.732 123.487,-174.864 117.655,-169.031 117.063,-169.031 D8.15@116.543,-168.511 118.666,-168.511 ; D3.15@44.999,-77.217 46.734,-75.482 46.734,-66.321 49.942,-63.112 51.433,-63.112 51.802,-62.743 51.802,-60.135 46.059,-54.393 D2.15@44.999,-54.393 ; D3.15@44.999,-77.217 45.794,-77.217 49.941,-81.364 50.696,-81.364 51.356,-82.024 51.356,-84.564 50.442,-85.479 50,-85.479 48.258,-87.221 48.258,-98.77 46.988,-100.04 ; D5.15@45.297,-122.864 45.718,-122.864 46.558,-122.024 46.558,-110.419 48.258,-108.719 52.087,-108.719 52.818,-107.989 52.818,-102.06 50.798,-100.04 46.988,-100.04 ; 117.563,-145.688 118.362,-144.889 118.362,-135.702 123.487,-130.576 123.487,-128.918 117.433,-122.864 D10.15@116.543,-122.864 116.024,-122.344 115.432,-122.344 114.806,-121.718 114.806,-117.33 117.854,-114.282 117.854,-113.132 123.487,-107.499 123.487,-105.84 122.866,-105.219 122.866,-104.309 118.597,-100.04 D11.15@116.543,-100.04 115.807,-100.04 115.168,-99.402 115.168,-95.124 118.362,-91.93 118.362,-89.546 123.487,-84.421 123.487,-82.762 117.941,-77.217 ; 117.563,-145.688 118.198,-145.688 118.209,-145.677 132.128,-145.677 137.793,-151.341 137.793,-154.313 136.345,-155.761 121.232,-155.761 120.063,-156.929 120.063,-167.114 118.666,-168.511 ; 118.666,-168.511 139.317,-168.511 152.321,-181.516 153.033,-181.516 156.716,-185.199 172.921,-185.199 175.283,-187.561 177.188,-187.561 177.696,-188.069 177.696,-190.051 178.814,-191.168 PLD1.4@178.814,-191.498 179.703,-191.498 180.254,-190.948 180.254,-190.662 180.517,-190.398 184.145,-190.398 194.186,-180.357 195.193,-180.357 198.819,-176.732 198.819,-175.073 192.257,-168.511 D23.15@191.557,-168.511 ; D23.15@191.557,-168.511 193.038,-167.031 193.038,-159.539 196.582,-155.995 196.582,-155.891 198.819,-153.654 198.819,-151.995 192.475,-145.652 D22.15@191.557,-145.652 ; D22.15@191.557,-145.652 193.638,-143.571 193.638,-136.606 199.419,-130.825 199.419,-128.669 196.151,-125.401 195.565,-125.401 192.955,-122.791 D21.15@191.557,-122.791 ; 192.403,-77.071 193.8,-75.674 193.8,-65.438 195.679,-63.559 198.118,-63.559 198.829,-62.847 198.829,-59.063 193.977,-54.212 192.402,-54.212 ; 192.402,-54.212 193.8,-52.814 193.8,-43.264 197.164,-39.899 205.597,-39.899 206.652,-38.844 206.652,-31.224 201.14,-25.713 195.578,-25.713 193.965,-27.325
GND(DIRTY): D0.8 D1.8 D2.8 D3.8 D4.8 D5.8 D6.8 D7.8 D8.8 D9.8 D10.8 D11.8 D12.8 D13.8 D14.8 D15.8 D16.8 D17.8 D18.8 D19.8 D20.8 D21.8 D22.8 D23.8 K1.5 K2.5 K3.5 K4.5 K5.5 K6.5 K7.5 K8.5 K9.5 K10.5 K11.5 K12.5 K13.5 K14.5 K15.5 K16.5 K17.5 K18.5 K19.5 K20.5 K21.5 K22.5 K23.5 K24.5 K25.5 K26.5 K27.5 K28.5 K29.5 K30.5 K31.5 K32.5 K33.5 K34.5 K35.5 K36.5 K37.5 K38.5 K39.5 K40.5 K41.5 K42.5 K43.5 K44.5 K45.5 K46.5 K47.5 K48.5 K49.5 K50.5 K51.5 K52.5 K53.5 K54.5 K55.5 K56.5 K57.5 K58.5 K59.5 K60.5 K61.5 K62.5 K63.5 K64.5 K65.5 K66.5 K67.5 K68.5 K69.5 K70.5 K71.5 K72.5 K73.5 K74.5 K75.5 K76.5 K77.5 K78.5 K79.5 K80.5 K81.5 K82.5 K83.5 K84.5 K85.5 K86.5 K87.5 K88.5 K89.5 K90.5 K91.5 K92.5 K93.5 K94.5 K95.5 K96.5 K97.5 K98.5 K99.5 K100.5 K101.5 K102.5 K103.5 K104.5 K105.5 K106.5 K107.5 K108.5 K109.5 K110.5 K111.5 K112.5 K113.5 K114.5 K115.5 K116.5 K117.5 K118.5 K119.5 K120.5 K121.5 K122.5 K123.5 K124.5 K125.5 K126.5 K127.5 K128.5 K129.5 K130.5 K131.5 K132.5 K133.5 K134.5 K135.5 K136.5 K137.5 K138.5 K139.5 K140.5 K141.5 K142.5 K143.5 K144.5 K145.5 K146.5 K147.5 K148.5 K149.5 K150.5 K151.5 K152.5 K153.5 K154.5 K155.5 K156.5 K157.5 K158.5 K159.5 K160.5 K161.5 K162.5 K163.5 K164.5 K165.5 K166.5 K167.5 K168.5 K169.5 K170.5 K171.5 K172.5 K173.5 K174.5 K175.5 K176.5 K177.5 K178.5 K179.5 K180.5 K181.5 K182.5 K183.5 K184.5 K185.5 K186.5 K187.5 K188.5 K189.5 K190.5 K191.5 K192.5 PLD1.7 | length 2489.8
  Top Layer w0.3: K60.5@33.208,-170.822 33.208,-172.684 36.656,-176.131 D7.8@39.408,-176.131 ; K44.5@33.208,-124.667 32.002,-125.874 32.002,-130.542 32.657,-131.197 38.694,-131.197 D5.8@39.408,-130.484 ; K32.5@33.208,-101.589 32.036,-102.761 32.036,-107.499 32.657,-108.119 38.949,-108.119 D4.8@39.408,-107.66 ; K36.5@33.208,-78.512 29.672,-78.512 26.042,-82.142 25.735,-82.142 25.115,-82.762 25.115,-84.421 26.528,-85.834 38.41,-85.834 D3.8@39.408,-84.837 ; K16.5@33.208,-55.434 33.208,-58.513 32.036,-59.685 32.036,-61.343 32.706,-62.013 D2.8@39.408,-62.013 ; K20.5@33.208,-32.356 33.208,-35.435 32.036,-36.607 32.036,-38.266 32.657,-38.886 33.821,-38.886 34.276,-39.341 39.256,-39.341 D1.8@39.408,-39.189 ; K8.5@33.208,-9.278 33.208,-12.238 32.036,-13.41 32.036,-15.188 33.214,-16.365 D0.8@39.408,-16.365 ; v1(36.597,-153.308) D6.8@39.408,-153.308 ; K45.5@50.099,-147.745 50.099,-147.506 48.867,-146.274 48.867,-133.967 51.966,-130.869 51.966,-116.289 48.867,-113.19 48.867,-110.915 50.463,-109.319 52.336,-109.319 53.418,-108.238 53.418,-93.636 50.696,-90.914 50.137,-90.914 48.867,-89.644 48.867,-87.46 49.553,-86.774 51.026,-86.774 51.966,-85.834 51.966,-80.9 50.099,-79.033 K26.5@50.099,-78.512 ; K72.5@105.344,-170.822 105.344,-173.528 104.172,-174.7 104.172,-176.732 104.793,-177.352 106.596,-177.352 107.817,-176.131 D8.8@111.543,-176.131 ; K80.5@105.344,-147.745 105.344,-150.472 104.172,-151.644 104.172,-153.654 104.793,-154.275 106.596,-154.275 107.563,-153.308 D9.8@111.543,-153.308 ; K88.5@105.344,-124.667 105.344,-127.324 103.388,-129.281 103.065,-129.281 102.406,-129.939 102.406,-130.884 103.319,-131.797 106.224,-131.797 107.537,-130.484 D10.8@111.543,-130.484 ; K100.5@105.344,-101.589 105.344,-104.186 103.792,-105.738 103.792,-108.181 105.159,-109.548 107.434,-109.548 109.322,-107.66 D11.8@111.543,-107.66 ; K104.5@105.344,-78.512 105.344,-80.31 104.888,-80.766 104.589,-80.766 104.15,-81.206 104.15,-81.827 104.172,-81.85 104.172,-84.421 104.793,-85.042 105.975,-85.042 106.18,-84.837 D12.8@111.543,-84.837 ; K116.5@105.344,-55.434 104.172,-56.606 104.172,-61.343 104.842,-62.013 D13.8@111.543,-62.013 ; K120.5@105.344,-32.356 105.344,-35.098 104.172,-36.27 104.172,-38.266 104.793,-38.886 106.421,-38.886 106.724,-39.189 D14.8@111.543,-39.189 ; K124.5@105.344,-9.278 104.172,-10.45 104.172,-15.188 104.519,-15.534 104.519,-15.667 104.963,-16.111 D15.8@111.543,-16.111 ; K192.5@178.835,-170.822 177.29,-172.368 177.29,-176.358 178.284,-177.352 179.466,-177.352 180.687,-176.131 D23.8@185.966,-176.131 ; K184.5@178.835,-147.745 178.835,-150.722 177.663,-151.894 177.663,-153.654 178.284,-154.275 179.969,-154.275 180.972,-153.272 D22.8@185.966,-153.272 ; K176.5@178.835,-124.667 177.663,-125.839 177.663,-130.576 178.284,-131.197 179.466,-131.197 180.252,-130.411 D21.8@185.966,-130.411 ; K168.5@178.835,-101.589 177.663,-102.761 177.663,-107.499 178.284,-108.119 179.466,-108.119 180.034,-107.552 D20.8@185.966,-107.552 ; K160.5@178.835,-78.512 177.29,-80.057 177.29,-84.047 178.284,-85.042 179.466,-85.042 179.816,-84.691 D19.8@185.966,-84.691 ; K152.5@178.835,-55.434 178.124,-56.145 178.108,-56.129 177.487,-56.129 177.048,-56.568 177.048,-57.189 177.229,-57.371 177.229,-58.036 177.663,-58.47 177.663,-61.343 178.284,-61.964 185.966,-61.964 D18.8@185.966,-61.832 ; K148.5@178.835,-32.356 177.663,-33.528 177.663,-38.266 178.284,-38.886 180.379,-38.886 180.464,-38.972 D17.8@185.966,-38.972 ; K136.5@178.835,-9.278 178.835,-11.656 183.29,-16.111 D16.8@185.966,-16.111
  Mid w0.3: K12.5@10.666,-32.392 10.702,-32.356 K19.5@26.287,-32.356 K20.5@33.208,-32.356 ; K62.5@10.681,-170.822 K63.5@18.491,-170.822 K64.5@26.287,-170.822 K60.5@33.208,-170.822 ; K54.5@10.681,-147.745 K55.5@18.491,-147.745 K56.5@26.287,-147.745 K48.5@33.208,-147.745 ; K50.5@10.681,-124.667 K51.5@18.491,-124.667 K52.5@26.287,-124.667 K44.5@33.208,-124.667 ; K38.5@10.681,-101.589 K39.5@18.491,-101.589 K40.5@26.287,-101.589 K32.5@33.208,-101.589 ; K22.5@10.681,-55.434 K23.5@18.491,-55.434 K24.5@26.287,-55.434 K16.5@33.208,-55.434 ; K3.5@10.681,-9.278 12.713,-9.278 15.243,-6.748 15.961,-6.748 K4.5@18.491,-9.278 K7.5@26.287,-9.278 K8.5@33.208,-9.278 ; K57.5@50.099,-170.822 50.443,-170.822 50.871,-170.395 55.267,-170.395 55.695,-170.822 K58.5@57.021,-170.822 ; K45.5@50.099,-147.745 K46.5@57.021,-147.745 ; K41.5@50.099,-124.667 K42.5@57.021,-124.667 ; K29.5@50.099,-101.589 K30.5@57.021,-101.589 ; K14.5@50.099,-55.434 K15.5@57.021,-55.434 ; K9.5@50.099,-32.356 K10.5@57.021,-32.356 64.731,-32.356 K18.5@64.768,-32.392 ; K1.5@50.099,-9.278 K2.5@57.021,-9.278 K5.5@64.395,-9.278 K6.5@71.879,-9.278 ; K123.5@90.422,-9.278 K131.5@98.183,-9.278 K124.5@105.344,-9.278 K132.5@122.235,-9.278 K122.5@129.157,-9.278 K130.5@136.531,-9.278 ; K71.5@98.183,-170.822 K72.5@105.344,-170.822 ; K79.5@98.183,-147.745 K80.5@105.344,-147.745 ; K87.5@98.183,-124.667 K88.5@105.344,-124.667 ; K99.5@98.183,-101.589 K100.5@105.344,-101.589 ; K103.5@98.183,-78.512 K104.5@105.344,-78.512 ; K115.5@98.183,-55.434 K116.5@105.344,-55.434 ; K119.5@98.183,-32.356 K120.5@105.344,-32.356 ; K73.5@122.235,-147.745 K74.5@129.157,-147.745 ; K81.5@122.235,-124.667 K82.5@129.157,-124.667 ; K89.5@122.235,-101.589 K90.5@129.157,-101.589 ; K94.5@122.235,-78.512 K101.5@129.157,-78.512 ; K105.5@122.235,-55.88 K106.5@129.157,-55.88 ; K109.5@122.235,-32.004 K110.5@129.157,-32.004 ; K140.5@163.339,-32.356 K147.5@171.025,-32.356 K148.5@178.835,-32.356 ; K128.5@163.339,-9.278 K135.5@171.025,-9.278 K136.5@178.835,-9.278 ; K191.5@171.025,-170.822 K192.5@178.835,-170.822 ; K183.5@171.025,-147.745 K184.5@178.835,-147.745 ; K175.5@171.025,-124.667 K176.5@178.835,-124.667 ; K167.5@171.025,-101.589 171.872,-102.436 172.712,-102.436 173.559,-101.589 K168.5@178.835,-101.589 ; K159.5@171.025,-78.512 K160.5@178.835,-78.512 ; K151.5@171.025,-55.434 K152.5@178.835,-55.434 ; PLD1.7@178.814,-188.958 179.703,-188.958 180.254,-188.408 180.254,-188.122 180.517,-187.858 216.49,-187.858 223.01,-181.338 223.01,-168.686 ; K185.5@197.567,-170.822 K186.5@205.377,-170.822 ; K177.5@197.567,-147.745 K178.5@205.377,-147.745 ; K169.5@197.567,-124.667 K170.5@205.377,-124.667 ; K161.5@197.567,-101.589 K162.5@205.377,-101.589 ; K153.5@197.567,-78.486 K154.5@205.377,-78.486 ; K141.5@197.567,-55.434 K142.5@205.377,-55.434 ; K137.5@197.567,-32.356 K138.5@205.377,-32.356 ; K126.5@197.567,-9.278 200.469,-9.278 202.441,-11.25 202.938,-11.25 203.44,-10.749 203.44,-9.599 203.76,-9.278 K133.5@205.377,-9.278 K134.5@213.063,-9.278 K121.5@220.873,-9.278 223.01,-11.415 223.01,-30.22 ; K190.5@220.873,-170.822 223.01,-168.686 ; K182.5@220.873,-147.745 223.01,-145.608 ; K174.5@220.873,-124.667 223.01,-122.531 ; K166.5@220.873,-101.589 223.01,-99.453 ; K158.5@220.873,-78.486 223.01,-76.35 ; K150.5@220.873,-55.434 223.01,-53.297 ; K146.5@220.873,-32.356 223.01,-30.22 ; 223.01,-168.686 223.01,-145.608 ; 223.01,-145.608 223.01,-122.531 ; 223.01,-122.531 223.01,-99.453 ; 223.01,-99.453 223.01,-76.35 ; 223.01,-76.35 223.01,-53.297 ; 223.01,-53.297 223.01,-30.22
  Signal Layer 2 w0.3: K48.5@33.208,-147.745 33.208,-149.919 v1(36.597,-153.308) ; K1.5@50.099,-9.571 K1.5@50.099,-9.278 ; K65.5@122.235,-170.822 K66.5@129.157,-170.822 ; K130.5@136.531,-9.278 K129.5@144.015,-9.278 K127.5@155.192,-9.278 K128.5@163.339,-9.278
  Bottom Layer w0.3: K33.5@10.681,-78.512 10.681,-77.361 18.491,-77.361 ; K25.5@18.491,-78.512 K25.5@18.491,-78.494 ; K60.5@33.208,-170.822 40.404,-170.822 ; K44.5@33.208,-124.667 44.627,-124.667 44.899,-124.939 ; K32.5@33.208,-101.589 K29.5@50.099,-101.589 ; K16.5@33.208,-55.434 33.637,-55.862 40.847,-55.862 41.343,-56.359 41.964,-56.359 ; K20.5@33.208,-32.356 34.005,-33.153 34.005,-34.244 34.507,-34.746 35.598,-34.746 36.394,-35.542 41.908,-35.542 45.094,-32.356 K9.5@50.099,-32.356 ; K8.5@33.208,-9.278 35.665,-9.278 36.009,-9.623 36.63,-9.623 36.974,-9.278 K1.5@50.099,-9.278 ; 44.923,-124.939 44.899,-124.939 ; K57.5@50.099,-170.822 49.79,-171.132 40.713,-171.132 ; K45.5@50.099,-147.745 50.045,-147.799 K48.5@33.262,-147.799 ; K41.5@50.099,-124.667 48.5,-126.267 48.5,-127.039 48.06,-127.479 47.439,-127.479 44.899,-124.939 ; K14.5@50.099,-55.434 43.111,-55.434 ; K58.5@57.021,-170.822 K59.5@64.395,-170.822 K61.5@71.88,-170.822 K67.5@82.817,-170.822 K68.5@90.422,-170.822 K71.5@98.183,-170.822 ; K46.5@57.021,-147.745 K47.5@64.395,-147.745 K53.5@71.88,-147.745 K75.5@82.817,-147.745 K76.5@90.422,-147.745 K79.5@98.183,-147.745 ; K42.5@57.021,-124.667 K43.5@64.395,-124.667 K49.5@71.879,-124.667 K83.5@82.817,-124.667 K84.5@90.422,-124.667 K87.5@98.183,-124.667 ; K30.5@57.021,-101.589 K31.5@64.395,-101.589 K37.5@71.88,-101.589 K91.5@82.817,-101.589 K92.5@90.422,-101.589 K99.5@98.183,-101.589 ; K27.5@57.021,-78.512 57.021,-77.262 56.525,-76.767 50.798,-76.767 50.099,-77.465 K26.5@50.099,-78.512 49.948,-78.36 45.972,-78.36 44.822,-79.51 34.44,-79.51 ; K15.5@57.021,-55.434 K21.5@64.395,-55.434 K13.5@71.879,-55.434 K107.5@82.817,-55.434 K108.5@90.422,-55.434 K115.5@98.183,-55.434 ; K28.5@64.395,-78.512 K34.5@71.88,-78.512 K95.5@82.817,-78.512 K96.5@90.422,-78.512 K103.5@98.183,-78.512 ; K18.5@64.768,-32.392 64.804,-32.356 K111.5@82.817,-32.356 K112.5@90.422,-32.356 K119.5@98.183,-32.356 ; K6.5@71.879,-9.278 K125.5@82.817,-9.278 K123.5@90.422,-9.278 ; K72.5@105.344,-170.822 105.484,-170.682 K65.5@122.095,-170.682 ; K80.5@105.344,-147.745 106.68,-149.08 114.552,-149.08 115.887,-147.745 K73.5@122.235,-147.745 ; K100.5@105.344,-101.589 106.607,-102.852 112.729,-102.852 ; K104.5@105.344,-78.512 110.277,-78.512 112,-80.235 120.512,-80.235 K94.5@122.235,-78.512 ; K116.5@105.344,-55.434 108.535,-55.434 110.488,-57.386 115.568,-57.386 117.074,-55.88 K105.5@122.235,-55.88 ; K120.5@105.344,-32.356 109.841,-32.356 112.012,-34.526 115.568,-34.526 118.09,-32.004 K109.5@122.235,-32.004 ; K81.5@121.71,-125.193 K81.5@122.235,-124.667 120.035,-124.667 119.51,-125.193 108.234,-125.193 107.788,-124.746 ; K89.5@122.235,-101.589 119.161,-101.589 117.898,-102.852 113.834,-102.852 ; K66.5@129.157,-170.822 K69.5@136.531,-170.822 K70.5@144.016,-170.822 K187.5@155.191,-170.822 K188.5@163.339,-170.822 K191.5@171.025,-170.822 ; K74.5@129.157,-147.745 K77.5@136.531,-147.745 K78.5@144.016,-147.745 K179.5@155.191,-147.745 K180.5@163.339,-147.745 K183.5@171.025,-147.745 ; K82.5@129.157,-124.667 K85.5@136.531,-124.667 K86.5@144.016,-124.667 K171.5@155.191,-124.667 K172.5@163.339,-124.667 K175.5@171.025,-124.667 ; K90.5@129.157,-101.589 K97.5@136.531,-101.589 K98.5@144.015,-101.589 K163.5@155.191,-101.589 K164.5@163.339,-101.589 K167.5@171.025,-101.589 ; K101.5@129.157,-78.512 K102.5@136.531,-78.512 K93.5@144.016,-78.512 K155.5@155.191,-78.512 K156.5@163.339,-78.512 K159.5@171.025,-78.512 ; K106.5@129.157,-55.88 K113.5@136.531,-55.88 K114.5@144.015,-55.88 154.745,-55.88 K143.5@155.191,-55.434 155.191,-53.754 ; K110.5@129.157,-32.004 129.508,-32.356 144.016,-32.356 K118.5@144.016,-32.342 ; K118.5@144.016,-32.004 K118.5@144.016,-32.342 ; K140.5@163.339,-32.356 K139.5@155.191,-32.356 153.972,-32.356 ; K151.5@171.025,-55.434 K144.5@163.339,-55.434 156.871,-55.434 155.191,-53.754 ; 178.548,-56.568 178.124,-56.145 K152.5@178.835,-55.434 186.131,-55.434 186.799,-54.766 196.899,-54.766 K141.5@197.567,-55.434 ; K192.5@178.835,-170.822 191.367,-170.822 192.219,-171.675 196.715,-171.675 K185.5@197.567,-170.822 ; K176.5@178.835,-124.667 187.121,-124.667 187.393,-124.939 197.295,-124.939 K169.5@197.567,-124.667 ; K168.5@178.835,-101.589 187.394,-101.589 187.629,-101.825 188.286,-101.825 188.521,-101.589 K161.5@197.567,-101.589 ; K148.5@178.835,-32.356 190.502,-32.356 ; 182.83,-147.718 182.68,-147.568 179.011,-147.568 K184.5@178.835,-147.745 178.835,-147.464 192.789,-147.464 ; 192.535,-147.718 192.789,-147.464 ; K177.5@197.567,-147.745 197.287,-147.464 192.789,-147.464 ; K153.5@197.567,-78.486 193.318,-78.486 193.094,-78.711 189.952,-78.711 189.753,-78.512 ; K137.5@197.567,-32.356 196.701,-31.49 191.368,-31.49 ; K126.5@197.567,-9.278 197.427,-9.138 182.067,-9.138 181.679,-9.527 180.064,-9.527 179.816,-9.278 K136.5@178.835,-9.278 178.835,-10.502 176.993,-12.345 166.551,-12.345 166.184,-12.711 161.288,-12.711 159.769,-14.23 159.769,-20.195 153.972,-25.992 ; K186.5@205.377,-170.822 K189.5@213.063,-170.822 K190.5@220.873,-170.822 ; K178.5@205.377,-147.745 K181.5@213.063,-147.745 K182.5@220.873,-147.745 ; K170.5@205.377,-124.667 K173.5@213.063,-124.667 K174.5@220.873,-124.667 ; K162.5@205.377,-101.589 K165.5@213.063,-101.589 K166.5@220.873,-101.589 ; K154.5@205.377,-78.486 K157.5@213.063,-78.486 K158.5@220.873,-78.486 ; K142.5@205.377,-55.434 K149.5@213.063,-55.434 K150.5@220.873,-55.434 ; K138.5@205.377,-32.356 K145.5@213.063,-32.356 K146.5@220.873,-32.356 ; K25.5@18.491,-78.494 20.368,-78.494 ; K25.5@18.491,-78.494 18.491,-77.361 ; 18.491,-77.361 19.235,-77.361 20.368,-78.494 ; 20.368,-78.494 26.287,-78.494 K35.5@26.287,-78.512 26.287,-79.535 27.506,-80.755 33.208,-80.755 33.208,-79.916 ; 33.208,-79.916 K36.5@33.208,-78.512 34.034,-79.337 ; 33.208,-79.916 34.034,-79.916 ; K48.5@33.262,-147.799 33.208,-147.799 K48.5@33.208,-147.745 K48.5@33.262,-147.799 ; 34.034,-79.916 34.034,-79.337 ; 34.034,-79.916 34.44,-79.51 ; 34.034,-79.337 34.206,-79.51 34.44,-79.51 ; 40.404,-170.822 40.713,-171.132 ; 40.404,-170.822 40.713,-171.132 ; 41.964,-56.359 42.889,-55.434 43.111,-55.434 ; 41.964,-56.359 42.186,-56.359 43.111,-55.434 ; 107.788,-124.746 106.458,-124.746 106.011,-125.193 105.87,-125.193 K88.5@105.344,-124.667 107.709,-124.667 107.788,-124.746 ; 112.729,-102.852 112.971,-103.095 113.592,-103.095 113.834,-102.852 ; 112.729,-102.852 113.834,-102.852 ; K65.5@122.095,-170.682 K65.5@122.235,-170.822 K65.5@122.095,-170.682 ; K118.5@144.016,-32.342 147.622,-32.342 147.608,-32.356 151.128,-32.356 149.368,-30.597 153.972,-25.992 ; 153.972,-32.356 153.972,-25.992 ; 153.972,-32.356 153.972,-52.535 155.191,-53.754 ; 187.194,-78.512 187.169,-78.486 178.86,-78.486 K160.5@178.835,-78.512 187.194,-78.512 ; 187.194,-78.512 187.393,-78.711 188.929,-78.711 189.128,-78.512 ; 187.194,-78.512 189.128,-78.512 ; 189.128,-78.512 189.13,-78.51 189.751,-78.51 189.753,-78.512 ; 189.128,-78.512 189.753,-78.512 ; 190.502,-32.356 191.368,-31.49 ; 190.502,-32.356 191.368,-31.49
NetD0_9: D0.9 D1.2 | length 17.6
  Top Layer w0.3: D1.2@39.408,-31.569 39.999,-31.569 44.407,-27.161 D0.9@44.407,-16.365
NetD1_9: D1.9 D2.2 | length 17.6
  Top Layer w0.3: D2.2@39.408,-54.393 39.999,-54.393 44.407,-49.984 D1.9@44.407,-39.189
NetD2_9: D2.9 D3.2 | length 17.6
  Top Layer w0.3: D3.2@39.408,-77.217 39.999,-77.217 44.407,-72.808 D2.9@44.407,-62.013
NetD3_9: D3.9 D4.2 | length 17.6
  Top Layer w0.3: D4.2@39.408,-100.04 39.999,-100.04 44.407,-95.632 D3.9@44.407,-84.837
NetD4_9: D4.9 D5.2 | length 17.6
  Top Layer w0.3: D5.2@39.408,-122.864 39.999,-122.864 44.407,-118.455 D4.9@44.407,-107.66
NetD5_9: D5.9 D6.2 | length 17.6
  Top Layer w0.3: D6.2@39.408,-145.688 39.999,-145.688 44.407,-141.279 D5.9@44.407,-130.484
NetD6_9: D6.9 D7.2 | length 17.6
  Top Layer w0.3: D7.2@39.408,-168.511 39.999,-168.511 44.407,-164.103 D6.9@44.407,-153.308
NetD7_9: D7.9 D8.2 | length 88.7
  Top Layer w0.3: D7.9@44.407,-176.131 46.401,-178.125 46.401,-178.509 46.785,-178.509 48.887,-180.611 48.887,-181.787 49.513,-182.413 105.975,-182.413 107.348,-181.04 107.348,-179.469 105.831,-177.952 104.544,-177.952 103.538,-176.946 103.538,-170.588 105.614,-168.511 D8.2@111.543,-168.511
NetD8_9: D8.9 D9.2 | length 33.8
  Top Layer w0.3: D9.2@111.543,-145.688 112.658,-145.688 114.206,-147.235 114.206,-174.385 115.432,-175.612 116.543,-175.612 D8.9@116.543,-176.131
NetD9_9: D9.9 D10.2 | length 33.2
  Top Layer w0.3: D10.2@111.543,-122.864 112.135,-122.864 112.918,-123.648 112.918,-128.614 113.518,-129.214 113.518,-129.927 113.628,-130.036 113.628,-145.195 115.168,-146.736 115.168,-152.524 115.952,-153.308 D9.9@116.543,-153.308
NetD10_9: D10.9 D11.2 | length 33.6
  Top Layer w0.3: D11.2@111.543,-100.04 112.805,-100.04 113.79,-101.025 113.79,-122.61 114.794,-123.614 114.794,-129.326 115.432,-129.964 116.024,-129.964 D10.9@116.543,-130.484
NetD11_9: D11.9 D12.2 | length 33.3
  Top Layer w0.3: D12.2@111.543,-77.217 112.135,-77.217 113.145,-78.227 113.338,-78.227 114.53,-79.418 114.53,-106.238 115.952,-107.66 D11.9@116.543,-107.66
NetD12_9: D12.9 D13.2 | length 33.2
  Top Layer w0.3: D13.2@111.543,-54.393 112.135,-54.393 113.952,-56.21 113.952,-76.808 115.168,-78.025 115.168,-84.053 115.952,-84.837 D12.9@116.543,-84.837
NetD13_9: D13.9 D14.2 | length 33.3
  Top Layer w0.3: D14.2@111.543,-31.569 112.369,-31.569 114.032,-33.232 114.032,-37.293 114.546,-37.808 114.546,-38.041 114.552,-38.046 114.552,-56.464 114.694,-56.607 114.694,-60.755 115.952,-62.013 D13.9@116.543,-62.013
NetD14_9: D14.9 D15.2 | length 33.8
  Top Layer w0.3: D15.2@111.543,-8.491 112.659,-8.491 114.46,-10.292 114.46,-32.46 114.632,-32.632 114.632,-36.07 115.168,-36.607 115.168,-38.406 115.952,-39.189 D14.9@116.543,-39.189
NetD15_9: D15.9 D16.2 | length 88
  Top Layer w0.3: D15.9@116.543,-16.111 118.558,-16.111 120.41,-17.964 122.861,-17.964 123.959,-19.061 125.83,-19.061 127.852,-17.04 127.852,-7.774 131.677,-3.949 134.739,-3.949 135.939,-2.749 137.122,-2.749 138.322,-3.949 142.224,-3.949 143.424,-2.749 144.607,-2.749 146.239,-4.381 148.949,-4.381 149.74,-3.59 149.74,-2.814 149.805,-2.749 179.426,-2.749 181.11,-4.433 181.315,-4.433 185.374,-8.491 D16.2@185.966,-8.491
NetD16_9: D16.9 D17.2 | length 17.7
  Top Layer w0.3: D17.2@185.966,-31.352 186.557,-31.352 190.966,-26.943 D16.9@190.966,-16.111
NetD17_9: D17.9 D18.2 | length 17.7
  Top Layer w0.3: D18.2@185.966,-54.212 186.557,-54.212 187.341,-53.428 187.341,-53.345 190.966,-49.72 D17.9@190.966,-38.972
NetD18_9: D18.9 D19.2 | length 17.7
  Top Layer w0.3: D19.2@185.966,-77.071 186.557,-77.071 190.966,-72.663 D18.9@190.966,-61.832
NetD19_9: D19.9 D20.2 | length 17.7
  Top Layer w0.3: D20.2@185.966,-99.932 186.557,-99.932 188.12,-98.369 188.12,-91.682 190.966,-88.836 D19.9@190.966,-84.691
NetD20_9: D20.9 D21.2 | length 17.7
  Top Layer w0.3: D21.2@185.966,-122.791 186.557,-122.791 188.882,-120.467 188.882,-113.526 190.966,-111.442 D20.9@190.966,-107.552
NetD21_9: D21.9 D22.2 | length 17.7
  Top Layer w0.3: D22.2@185.966,-145.652 186.557,-145.652 187.612,-144.597 187.612,-134.862 190.966,-131.508 D21.9@190.966,-130.411
NetD22_9: D22.9 D23.2 | length 17.7
  Top Layer w0.3: D23.2@185.966,-168.511 186.557,-168.511 190.966,-164.103 D22.9@190.966,-153.272